# Altium PCB EvvGC v1.2.PcbDoc
Units mm, origin at the board's own origin, x right, y up, seen from the top; angles counter-clockwise.
Board outline 50 x 50 mm, 2 copper layers (Top Layer, Bottom Layer); 65 components, 73 nets, 303 pads, 65 vias.
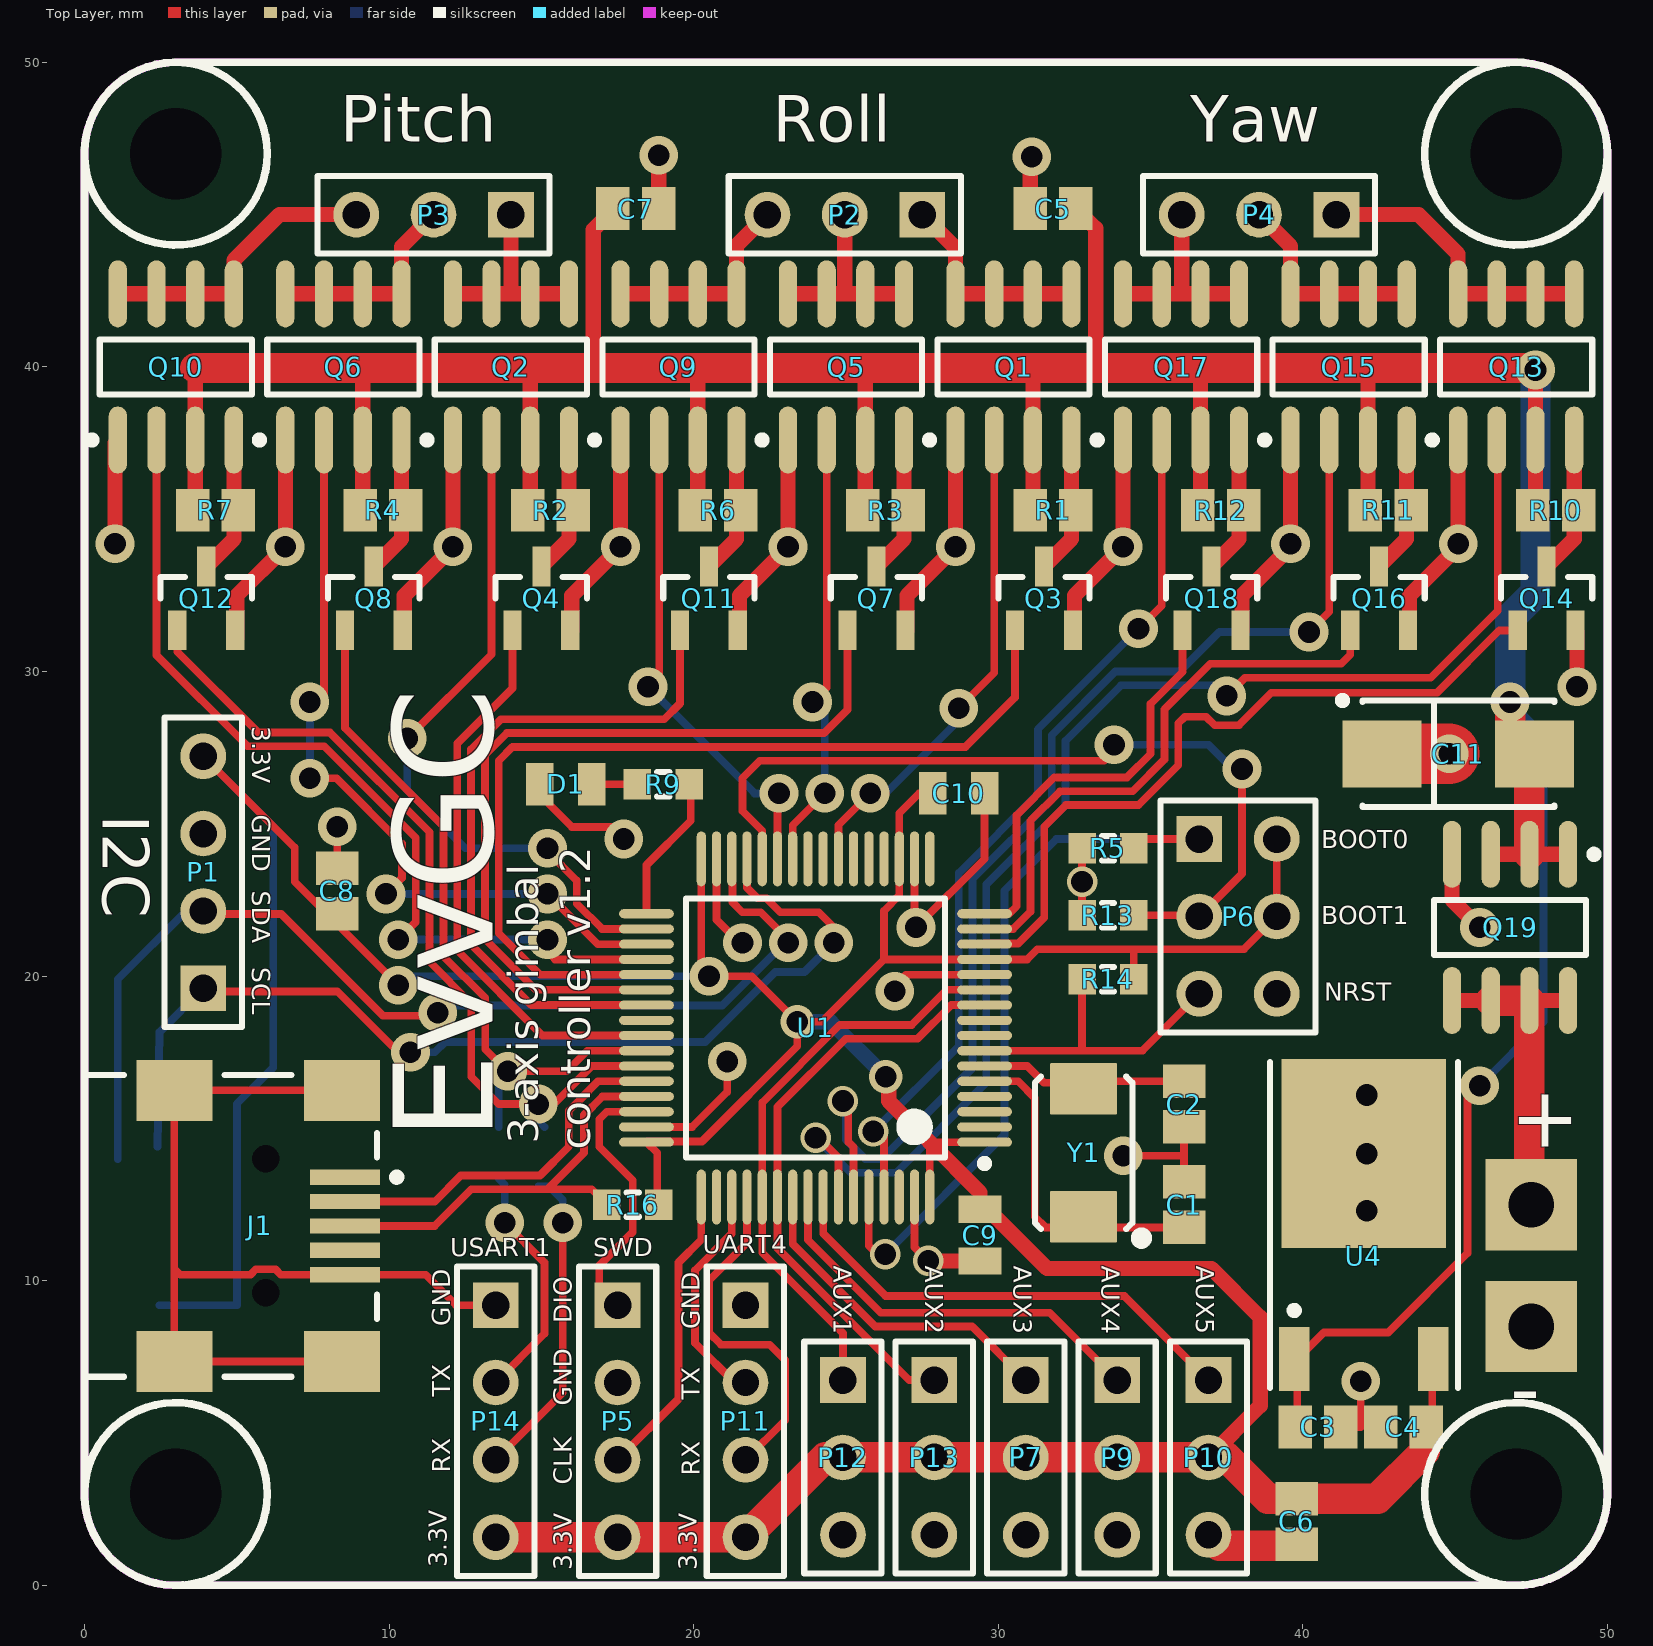
[diagram p0: Top Layer view]
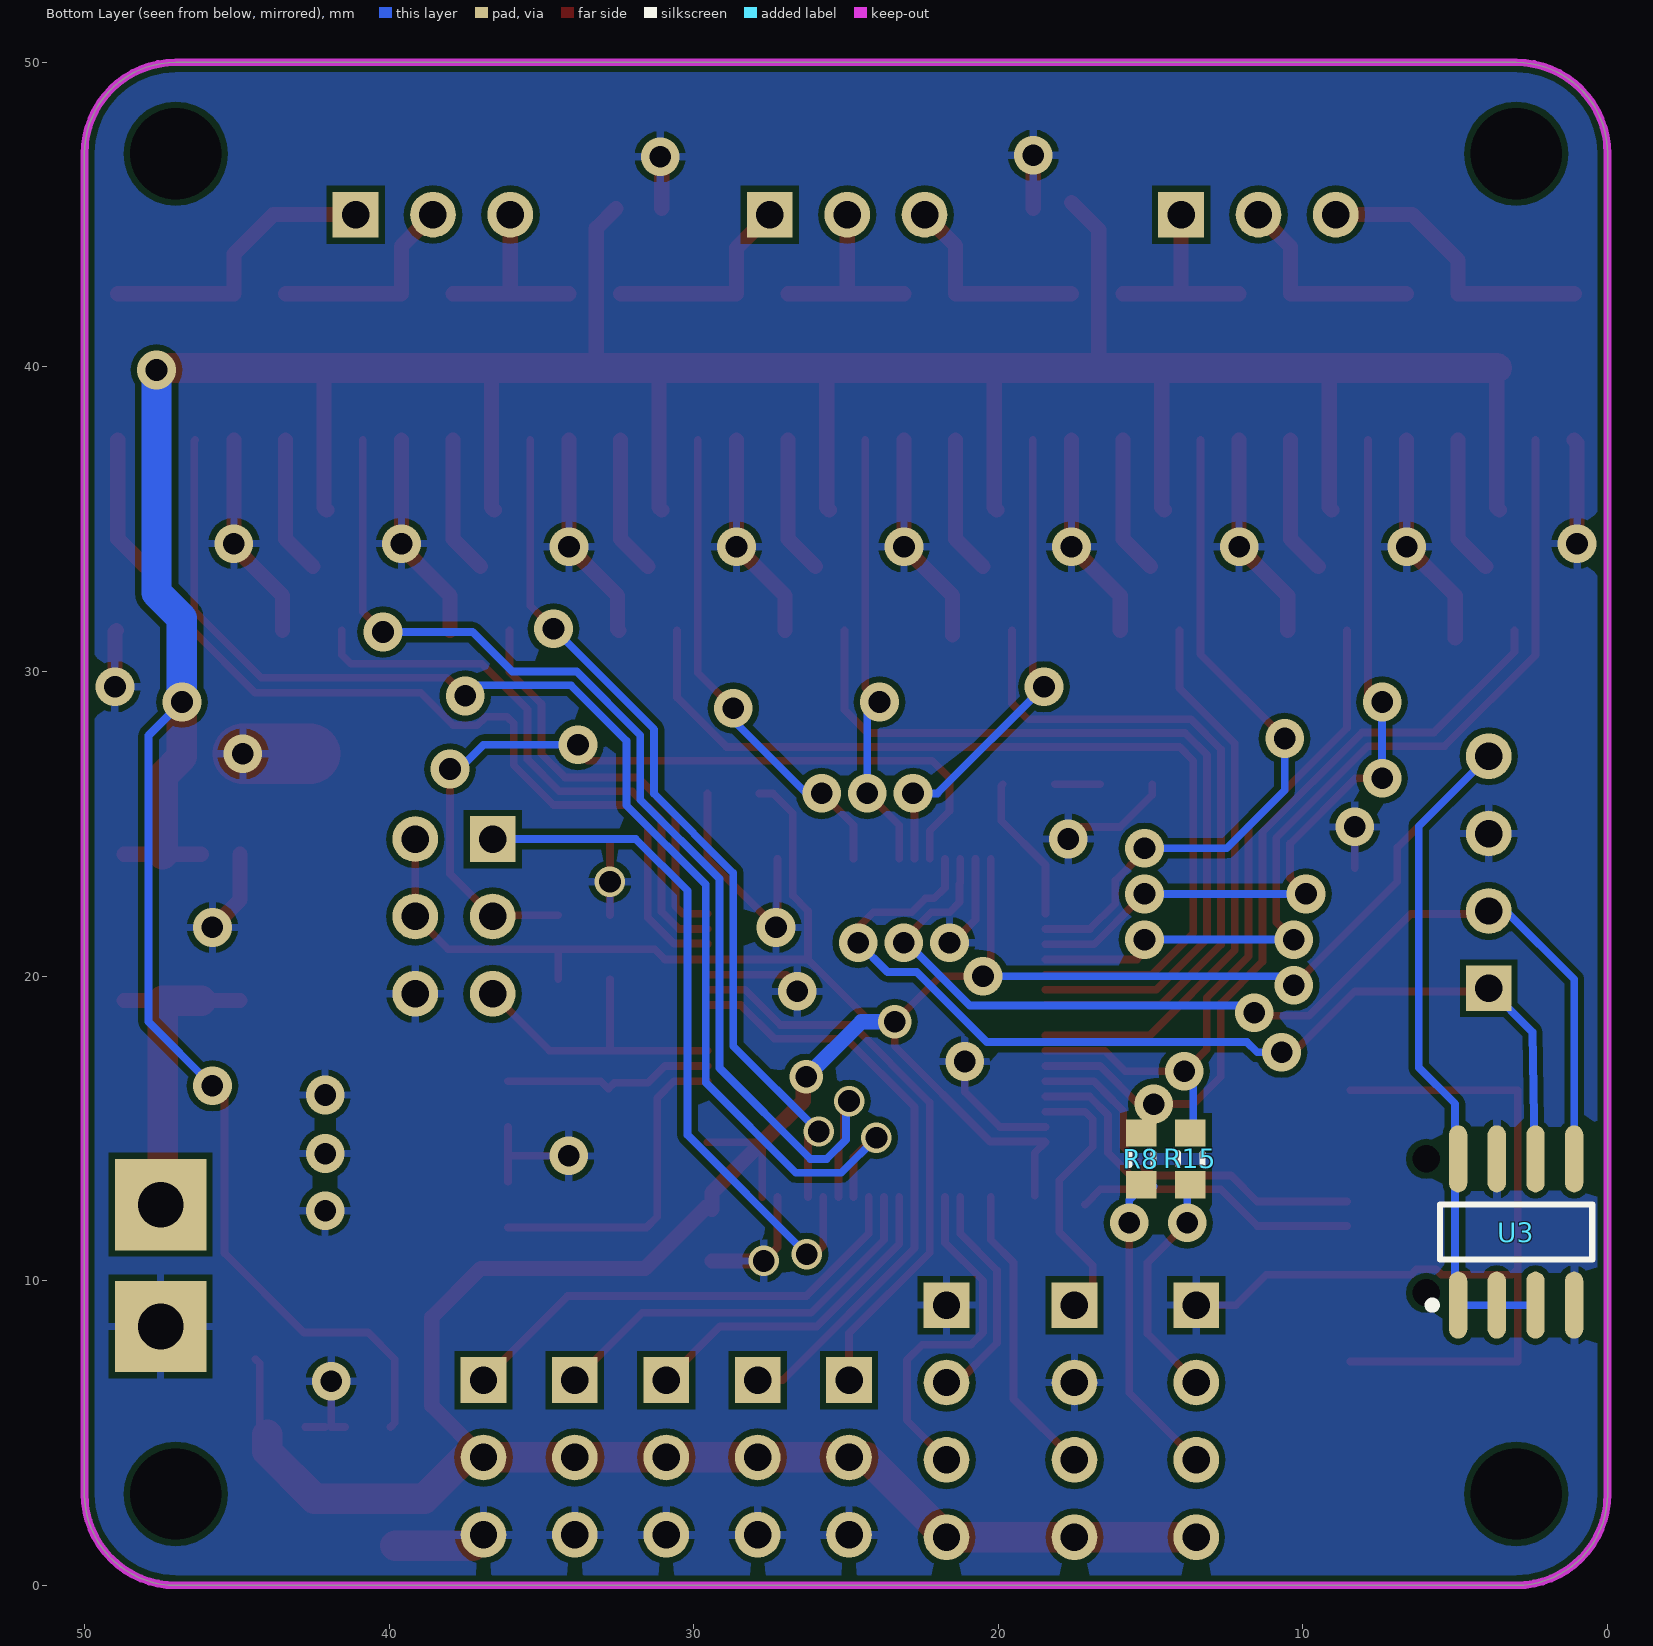
[diagram p1: Bottom Layer view, seen from below]

## Layer stack, top to bottom
Top Layer: signal copper 0.0356
Dielectric: dielectric 0.32, FR-4, Dk 4.8
Bottom Layer: signal copper 0.0356

## Board outline
0,3 ccw(c3,3) 3,0 47,0 ccw(c47,3) 50,3 50,47 ccw(c47,47) 47,50 3,50 ccw(c3,47) 0,47

## Design rules (kind name [scope] priority, off if disabled: settings)
Clearance [All] p1: gap=0.2
PolygonConnect [All] p1: connectstyle=Relief reliefconductorwidth=0.254 reliefentries=4 polygonreliefangle="90 Angle"
RoutingVias [All] p1: holewidth=0.711 width=1.27 viastyle="Through Hole" minholewidth=0.711 minwidth=1.27 maxholewidth=0.711 maxwidth=1.27
SilkscreenOverComponentPads [All] p1: minsilkscreentomaskgap=0.254
SolderMaskExpansion [All] p1: expansion=0.102
Width [All] p1: maxlimit=2 minlimit=0.254 preferedwidth=0.254
27 further rules are at their usual default settings.

## Components (designator, comment, footprint, x,y, rotation, side; value= is the part's Value field where it differs from the comment)
C1 "22pF" CAPC2012L#1 36.1,12.5 r90 top
C2 "22pF" CAPC2012L#1 36.1,15.8 r270 top
C3 "100nF" CAPC2012L#1 40.5,5.2 r0 top
C4 "100nF" CAPC2012L#1 43.3,5.2 r180 top
C5 "100nF" CAPC2012L#1 31.8,45.2 r180 top
C6 "100nF" CAPC2012L#1 39.8,2.1 r270 top
C7 "100nF" CAPC2012L#1 18.1,45.2 r0 top
C8 "100nF" CAPC2012L#1 8.3,22.8 r90 top
C9 "100nF" CAPC2012L#2 29.4,11.5 r270 top
C10 "100nF" CAPC2012L#2 28.7,26 r0 top
C11 "47uF" TC6032-2412 45.1,27.3 r0 top
D1 "LED2" CAPC2012L#2 15.8,26.3 r180 top
J1 "USB Mini" 440247 0.7,11.8 r180 top
P1 "I2C" HDR1X4 3.9,19.6 r90 top
P2 "Header 3" HDR1X3 27.5,45 r180 top
P3 "Header 3" HDR1X3 14,45 r180 top
P4 "Header 3" HDR1X3 41.1,45 r180 top
P5 "SWD" HDR1X4 17.5,9.2 r270 top
P6 "BOOT" HDR2X3 36.6,24.5 r270 top
P7 "Aux3" HDR1X3 30.9,6.74 r270 top
P9 "Aux4" HDR1X3 33.9,6.74 r270 top
P10 "Aux5" HDR1X3 36.9,6.74 r270 top
P11 "UART4" HDR1X4 21.7,9.2 r270 top
P12 "Aux1" HDR1X3 24.9,6.74 r270 top
P13 "Aux2" HDR1X3 27.9,6.74 r270 top
P14 "UART1" HDR1X4 13.5,9.2 r270 top
Q1 "SI4599DY" SO-8_N 30.5,40 r90 top
Q2 "SI4599DY" SO-8_N 14,40 r90 top
Q3 "BSS123" SOT23_N_EM 31.5,32.4 r90 top
Q4 "BSS123" SOT23_N_EM 15,32.4 r90 top
Q5 "SI4599DY" SO-8_N 25,40 r90 top
Q6 "SI4599DY" SO-8_N 8.5,40 r90 top
Q7 "BSS123" SOT23_N_EM 26,32.4 r90 top
Q8 "BSS123" SOT23_N_EM 9.5,32.4 r90 top
Q9 "SI4599DY" SO-8_N 19.5,40 r90 top
Q10 "SI4599DY" SO-8_N 3,40 r90 top
Q11 "BSS123" SOT23_N_EM 20.5,32.4 r90 top
Q12 "BSS123" SOT23_N_EM 4,32.4 r90 top
Q13 "SI4599DY" SO-8_N 47,40 r90 top
Q14 "BSS123" SOT23_N_EM 48,32.4 r90 top
Q15 "SI4599DY" SO-8_N 41.5,40 r90 top
Q16 "BSS123" SOT23_N_EM 42.5,32.4 r90 top
Q17 "SI4599DY" SO-8_N 36,40 r90 top
Q18 "BSS123" SOT23_N_EM 37,32.4 r90 top
Q19 "IRF9335" SO-8_N 46.8,21.6 r270 top
R1 "330R" C0805 31.8,35.3 r180 top
R2 "330R" C0805 15.3,35.3 r180 top
R3 "330R" C0805 26.3,35.3 r180 top
R4 "330R" C0805 9.8,35.3 r180 top
R5 "1K5" RESC1608N 33.6,24.2 r180 top
R6 "330R" C0805 20.8,35.3 r180 top
R7 "330R" C0805 4.3,35.3 r180 top
R8 "1K5" RESC1608N 15.3,14 r270 bottom
R9 "1K5" RESC1608N 19,26.3 r180 top
R10 "330R" C0805 48.3,35.3 r180 top
R11 "330R" C0805 42.8,35.3 r180 top
R12 "330R" C0805 37.3,35.3 r180 top
R13 "1K5" RESC1608N 33.6,22 r0 top
R14 "1K5" RESC1608N 33.6,19.9 r0 top
R15 "1K5" RESC1608N 13.7,14 r270 bottom
R16 "1K5" RESC1608N 18,12.5 r180 top
U1 "STM32F103RCT6" LQFP64_N 24,18.3 r180 top
U3 "24C02C-E/SN" SOIC-SN8_N 3,11.6 r90 bottom
U4 "78M33" TO-252 42,10.8 r0 top
Y1 "8MHz" ABM3 32.8,14.2 r90 top

## Footprints (in the part's own frame and the unit in brackets; to place one, negate y for a bottom-side part, rotate by r counter-clockwise, add the part's x,y. Pads: shape width x height; smd on the part's side, far side on the other; paste and mask are expansions set on the pad)
440247 [mm] "Connector; USB2.0, Type B, SM; 5 Position; Right Angle"
  rect 2.3x0.5 smd: 1(-7.85,-1.6) 2(-7.85,-0.8) 3(-7.85,0) 4(-7.85,0.8) 5(-7.85,1.6)
  rect 2.5x2 smd: 6(-7.75,4.45) 7(-2.25,4.45) 8(-7.75,-4.45) 9(-2.25,-4.45)
  round 0.6 hole 0.9 unplated: MH1(-5.25,2.2) MH2(-5.25,-2.2)
  silkscreen extent -9.68,-4.95 0.7,4.95
ABM3 [mm] "CRYSTAL 5x3.2mm"
  rrect5% 1.7x2.2 smd: 1(-2.1,0) 2(2.1,0)
  silkscreen extent -2.9,-2 2.5,1.6, body extent -3.05,-1.2 3.05,1.2, height 1.3
C0805 [mm] "Chip Capacitor, Body 2.0x1.3mm, IPC High Density"
  rect 1.1x1.4 smd: 1(-0.75,0) 2(0.75,0)
  body extent -1.1,-0.72 1.1,0.72, height 1.4
CAPC2012L#1 [mm] "Chip Capacitor, Body 2.0x1.3mm, IPC High Density"
  rect 1.1x1.4 smd: 1(-0.75,0) 2(0.75,0)
  body extent -1.1,-0.72 1.1,0.72, height 1.1
CAPC2012L#2 [mm] "Chip Capacitor, Body 2.0x1.3mm, IPC High Density"
  rect 0.9x1.4 smd: 1(-0.85,0) 2(0.85,0)
  body extent -1.1,-0.72 1.1,0.72, height 1.4
HDR1X3 [mm] "Connector; Header; 3 Position"
  rect 1.5x1.5 hole 0.9: 1(0,0)
  round 1.5 hole 0.9: 2(2.54,0) 3(5.08,0)
  silkscreen extent -1.27,-1.27 6.35,1.27
HDR1X4 [mm] "Connector; Header; 4 Position"
  rect 1.5x1.5 hole 0.9: 1(0,0)
  round 1.5 hole 0.9: 2(2.54,0) 3(5.08,0) 4(7.62,0)
  silkscreen extent -1.27,-1.27 8.89,1.27
HDR2X3 [mm] "Connector; Header; 3x2 Position"
  rect 1.5x1.5 hole 0.9: 1(0,0)
  round 1.5 hole 0.9: 2(0,2.54) 3(2.54,0) 4(2.54,2.54) 5(5.08,0) 6(5.08,2.54)
  silkscreen extent -1.27,-1.27 6.35,3.81
LQFP64_N [mm] "Thin QFP, 64-Leads, Body 10x10mm, Pitch 0.5mm, IPC Medium Density"
  oval 1.8x0.3 smd: 1(-5.55,3.75) 2(-5.55,3.25) 3(-5.55,2.75) 4(-5.55,2.25) 5(-5.55,1.75) 6(-5.55,1.25) 7(-5.55,0.75) 8(-5.55,0.25) 9(-5.55,-0.25) 10(-5.55,-0.75) 11(-5.55,-1.25) 12(-5.55,-1.75) 13(-5.55,-2.25) 14(-5.55,-2.75) 15(-5.55,-3.25) 16(-5.55,-3.75) 33(5.55,-3.75) 34(5.55,-3.25) 35(5.55,-2.75) 36(5.55,-2.25) 37(5.55,-1.75) 38(5.55,-1.25) 39(5.55,-0.75) 40(5.55,-0.25) 41(5.55,0.25) 42(5.55,0.75) 43(5.55,1.25) 44(5.55,1.75) 45(5.55,2.25) 46(5.55,2.75) 47(5.55,3.25) 48(5.55,3.75)
  oval 0.3x1.8 smd: 17(-3.75,-5.55) 18(-3.25,-5.55) 19(-2.75,-5.55) 20(-2.25,-5.55) 21(-1.75,-5.55) 22(-1.25,-5.55) 23(-0.75,-5.55) 24(-0.25,-5.55) 25(0.25,-5.55) 26(0.75,-5.55) 27(1.25,-5.55) 28(1.75,-5.55) 29(2.25,-5.55) 30(2.75,-5.55) 31(3.25,-5.55) 32(3.75,-5.55) 49(3.75,5.55) 50(3.25,5.55) 51(2.75,5.55) 52(2.25,5.55) 53(1.75,5.55) 54(1.25,5.55) 55(0.75,5.55) 56(0.25,5.55) 57(-0.25,5.55) 58(-0.75,5.55) 59(-1.25,5.55) 60(-1.75,5.55) 61(-2.25,5.55) 62(-2.75,5.55) 63(-3.25,5.55) 64(-3.75,5.55)
  silkscreen extent -5.68,-4.25 4.25,4.57, body extent -5,-5 5,5, height 1.6
RESC1608N [mm] "Chip Resistor, Body 1.6x0.8mm, IPC Medium Density"
  rect 0.9x1 smd: 1(-0.85,0) 2(0.85,0)
  silkscreen extent -0.2,-0.4 0.2,0.4, body extent -0.85,-0.48 0.85,0.48, height 0.6
SO-8_N [mm] "SOIC, 8-Leads, Body 4.9x3.9mm, Pitch 1.27mm, IPC Medium Density"
  oval 2.2x0.6 smd: 1(-2.4,1.905) 2(-2.4,0.635) 3(-2.4,-0.635) 4(-2.4,-1.905) 5(2.4,-1.905) 6(2.4,-0.635) 7(2.4,0.635) 8(2.4,1.905)
  silkscreen extent -2.52,-2.5 0.9,2.88, body extent -1.95,-2.45 1.95,2.45, height 1.75
SOIC-SN8_N [mm] "SOIC, 8-Leads, Body 4.9x3.8mm, Pitch 1.27mm, IPC Medium Density"
  oval 2.2x0.6 smd: 1(-2.4,1.905) 2(-2.4,0.635) 3(-2.4,-0.635) 4(-2.4,-1.905) 5(2.4,-1.905) 6(2.4,-0.635) 7(2.4,0.635) 8(2.4,1.905)
  silkscreen extent -2.52,-2.5 0.9,2.88, body extent -2,-2.5 2,2.5, height 1.75
SOT23_N_EM [mm] "SOT23, 3-Leads, Body 2.9x1.3mm, Pitch 0.95mm, Lead Span 2.3mm, IPC Medium Density"
  rect 1.3x0.6 smd: 1(-1.05,0.95) 2(-1.05,-0.95) 3(1.05,0)
  silkscreen extent 0,-1.5 0.7,1.5, body extent -0.7,-1.5 0.7,1.5, height 1.1
TC6032-2412 [mm] "Capacitor, SM Tantalum; Body 6.0 x 3.2 mm (LxW typ)"
  rect 2.6x2.2 smd: 1(-2.5,0) 2(2.5,0)
  silkscreen extent -3.92,-1.75 3.15,1.87, body extent -3.9,-1.2 3.9,1.2, height 3.4
TO-252 [mm] "D-PAK/TO-252-AA; 3 Leads (1 Cropped); Body 10.1 (inc. leads) x 6.6 mm (LxW max)"
  rect 1x2.1 smd: 1(-2.285,-3.375) 3(2.285,-3.375)
  rect 5.4x6.2 smd: 4(0,3.375)
  silkscreen extent -3.09,-4.32 3.09,6.38

## Part data
C1 C2 C3 C4 C5 C6 C7 C8 C9 C10: library part CAP0805, "Capacitor"
C11: library part Cap, "Capacitor"
D1: "Typical RED, GREEN, YELLOW, AMBER GaAs LED"
J1: library part 440247-2, "USB 2.0, Right Angle, SMT, B Type, Receptacle, 5 Position, Black"
P1 P5 P11 P14: library part "Header 4", "Header, 4-Pin"
P2 P3 P4: "Header, 3-Pin"
P6: library part "Header 3X2", "Header, 3-Pin, Dual row"
P7 P9 P10 P12 P13: library part "Header 3", "Header, 3-Pin"
Q1 Q2 Q5 Q6 Q9 Q10 Q13 Q15 Q17: library part AUIRF7343, "HEXFET Power MOSFET"
Q3 Q4 Q7 Q8 Q11 Q12 Q14 Q16 Q18: library part 2N7002, "N-channel Enhancement Mode Field-effect Transistor"
Q19: library part IRF7404, "HEXFET Power MOSFET"
R1 R2 R3 R4 R6 R7 R10 R11 R12: library part Res, "Resistor"
R5 R8 R9 R13 R14 R15 R16: library part "RES 0603 330R", "RES 0603 1K5"
U1: library part STM32F103RBT6, "STM32 ARM-based 32-bit MCU with 128 Kbytes Flash, 64-pin LQFP, Industrial Temperature"
U3: "2Kbit, 400kHz, 5V, I2C Serial EEPROM, 8-Pin SOIC 150mil, Extended Temperature"
U4: library part L78M05CDT, "Positive Voltage Regulator"
Y1: library part "CRYSTAL 16M SMD5x3.2mm", "CRYSTAL 16M SMD5x3.2mm"

## Free pads (board coordinates)
  round 1.524 hole 3: 0(3,3) 0(3,47) 0(47,3) 0(47,47)
  rect 3x3 hole 1.5: 1(47.5,8.5) 1(47.5,12.5)

## Via types
v1: diameter 1.27, hole 0.711, Top Layer to Bottom Layer, tented both sides, 54 vias
v2: diameter 1, hole 0.711, Top Layer to Bottom Layer, tented both sides, 6 vias
v3: diameter 1.27, hole 0.711, Top Layer to Bottom Layer, 3 vias
v4: diameter 1.1, hole 0.711, Top Layer to Bottom Layer, tented both sides, 2 vias

## Nets (pads, with @x,y where several pads share a name; then routed paths per layer and width w, separated by ;. In a path a pad name is that pad's centre, name@x,y a point inside that pad or via, vN(x,y) a via of type N, cw(c..) or ccw(c..) an arc to the next point about the centre after c; other vN are vias at no path point)
3.3V: C4.1 C6.1 C8.1 C9.1 C10.1 P1.4 P5.4 P6.2 P6.4 P7.2 P9.2 P10.2 P11.4 P12.2 P13.2 P14.4 R14.2 R16.1 U1.1 U1.13 U1.19 U1.32 U1.48 U1.64 U3.1 U3.2 U3.3 U3.8 U4.3 | length 150.8
  Top Layer w0.254: P1.4 6.9,24.22 6.9,23.1 v1(10.3,19.7) ; R16.1@18.8,12.8 18.8,14.2 U1.48 18.473,14.573 20.273,14.573 23.4,17.7 v4(23.4,18.5) ; U1.32 20.25,20.25 v1(20.5,20) 21.9,20 23.3,18.6 v4(23.4,18.5) ; U1.64 27.75,14.55 U1.1 ; C10.1 27.4,26 26.75,25.35 U1.19 26.75,22.65 26.25,22.15 26.25,20.55 ; R14.2 34.45,20.883 ; P6.2 P6.4 38.063,20.883 34.45,20.883 ; C4.1@44.25,5.2 44.25,7.29 U4.3@44.385,7.425 ; v4(23.4,18.5) 24.2,18.5 26.25,20.55 ; 26.25,20.55 U1.13 30.95,20.55 31.283,20.883 34.45,20.883
  Top Layer w0.5: v4@23.3,18.6 v4@23.5,18.6 ; v4(23.4,18.5) v4@23.5,18.6 ; v4(26.3,16.7) 26.4,16.6 26.4,15.9 27.75,14.55 29.4,12.9 C9.1 ; C9.1@29.55,12.45 31.6,10.4 37,10.4 38.6,8.8 38.6,5.9 P10.2
  Top Layer w1: P14.4 P11.4 24.32,4.2 P12.2 P13.2 P7.2 P9.2 P10.2 37.5,4.2 38.85,2.85 C6.1 42.45,2.85 44,4.4 C4.1@44,4.95
  Bottom Layer w0.254: U3.3@2.465,9.2 U3.2 U3.1 5.005,9.2 5.005,15.805 6.2,17 6.2,24.92 P1.4 ; v1(10.3,19.7) 10.3,19.8 10.5,20 v1(20.5,20)
  Bottom Layer w0.5: v4(23.4,18.5) 24.5,18.5 v4(26.3,16.7)
5V: J1.1
12V: pad.1@47.5,12.5 Q19.5 Q19.6 Q19.7 Q19.8 | length 10.5
  Top Layer w0.5: Q19.5 Q19.6 ; Q19.7 Q19.8
  Top Layer w1: Q19.6 Q19.7 47.435,12.565 pad.1@47.5,12.5
"12V MOTOR": C3.1 C5.1 C7.1 C11.2 Q1.3 Q2.3 Q5.3 Q6.3 Q9.3 Q10.3 Q13.3 Q15.3 Q17.3 Q19.1 Q19.2 Q19.3 R1.2 R2.2 R3.2 R4.2 R6.2 R7.2 R10.2 R11.2 R12.2 U4.1 | length 145.7
  Top Layer w0.254: C3.1@39.95,5.2 39.815,5.335 39.815,7.425 40.69,8.3 42.8,8.3 45.4,10.9 45.4,16 v1(45.8,16.4)
  Top Layer w0.5: R7.2 3.635,35.385 Q10.3 3.635,39.965 ; R4.2 9.135,35.385 Q6.3 9.135,39.9 9.2,39.965 ; R2.2 14.635,35.385 Q2.3 14.635,39.93 14.6,39.965 ; 16.7,39.965 16.7,44.5 C7.1@17.6,45.4 ; R6.2 20.135,35.385 Q9.3 20.135,39.9 20.2,39.965 ; R3.2 25.635,35.385 Q5.3 25.635,39.8 25.8,39.965 ; R1.2 31.135,35.385 Q1.3 31.135,39.8 31.3,39.965 ; C5.1 33.2,44.55 33.2,39.965 ; 36.5,39.965 36.635,39.83 Q17.3 36.635,35.385 R12.2 ; R11.2 42.135,35.385 Q15.3 42.135,39.9 42.2,39.965 ; Q19.3 Q19.2 Q19.1 ; R10.2 47.635,35.385 Q13.3 v1(47.635,39.9) v1@47.7,39.965
  Top Layer w1: 3.635,39.965 9.2,39.965 14.6,39.965 16.7,39.965 ; 16.8,39.965 20.2,39.965 25.8,39.965 31.3,39.965 33.2,39.965 ; 33.3,39.965 36.5,39.965 42.2,39.965 v1@47.7,39.965 ; v1(46.8,29) 46.8,27.2 47.435,26.565 Q19.2
  Bottom Layer w0.254: v1(45.8,16.4) 47.9,18.5 47.9,27.9 v1(46.8,29)
  Bottom Layer w1: v1(46.8,29) 46.8,31.75 47.635,32.585 v1(47.635,39.9)
AUX1: P12.1 U1.11 U1.53 | length 19
  Top Layer w0.254: P12.1 24.9,8.274 22.25,10.924 U1.53 22.25,15.85 24.8,18.4 27.16,18.4 28.31,19.55 U1.11
AUX2: P13.1 U1.10 U1.54 | length 19.8
  Top Layer w0.254: P13.1 27.076,6.74 22.75,11.066 U1.54 22.75,15.708 24.988,17.946 27.349,17.946 28.453,19.05 U1.10
AUX3: P7.1 U1.55 | length 11
  Top Layer w0.254: U1.55 23.25,11.208 25.958,8.5 29.14,8.5 P7.1
AUX4: P9.1 U1.56 | length 13.5
  Top Layer w0.254: U1.56 23.75,11.35 26.146,8.954 31.686,8.954 P9.1
AUX5: P10.1 U1.57 | length 15.8
  Top Layer w0.254: U1.57 24.25,11.55 26.3,9.5 34.14,9.5 P10.1
BOOT0: P6.1 R5.1 U1.60 | length 25.1
  Top Layer w0.254: U1.60 25.75,11.15 26.028,10.872 v2(26.288,10.872) ; R5.1@34.45,24.5 P6.1
  Bottom Layer w0.254: v2(26.288,10.872) 30.2,14.784 30.2,22.8 31.9,24.5 P6.1
BOOT1: P6.3 R13.2 U1.28 | length 28.5
  Top Layer w0.254: U1.28 22.25,24.775 21.6,25.425 21.6,26.5 22.171,27.071 33.471,27.071 34,27.6 v1(33.8,27.6) ; R13.2 36.56,22 P6.3 38,23.36 v1(38,26.8)
  Bottom Layer w0.254: v1(33.8,27.6) 36.9,27.6 38,26.5 v1(38,26.8)
DM: J1.2 U1.44 | length 12.2
  Top Layer w0.254: J1.2 11.5,12.6 12.354,13.454 14.954,13.454 15.9,14.4 15.9,15.584 16.546,16.23 16.546,16.238 16.858,16.55 U1.44
DP: J1.3 R16.2 U1.45 | length 14.5
  Top Layer w0.254: J1.3 11.5,11.8 12.7,13 16.65,13 R16.2 ; 15.2,13 16.4,14.2 16.4,15.442 17,16.042 17,16.05 U1.45
GND: C1.2 C2.2 C3.2 C4.2 C5.2 C6.2 C7.2 C8.2 C9.2 C10.2 C11.1 D1.2 J1.5 J1.6 J1.7 J1.8 J1.9 P1.3 P5.2 P6.6 P7.3 P9.3 P10.3 P11.1 P12.3 P13.3 P14.1 pad.1@47.5,8.5 Q1.1 Q2.1 Q3.2 Q4.2 Q5.1 Q6.1 Q7.2 Q8.2 Q9.1 Q10.1 Q11.2 Q12.2 Q13.1 Q14.2 Q15.1 Q16.2 Q17.1 Q18.2 Q19.4 R5.2 R13.1 U1.12 U1.18 U1.31 U1.47 U1.63 U3.4 U3.7 U4.4 | length 141.5
  Top Layer w0.254: C8.2 v1(8.3,24.9) ; J1.6 J1.7 2.95,10.4 ; J1.8 J1.9 2.95,10.4 ; J1.5 11.2,10.2 12.2,9.2 P14.1 ; J1.5 6.449,10.2 6.272,10.377 5.628,10.377 5.451,10.2 3.15,10.2 2.95,10.4 ; D1.2 14.95,25.95 16,24.9 17.3,24.9 v1(17.7,24.5) ; U1.47 19.95,15.05 21.1,16.2 v1(21.1,17.2) ; U1.31 20.75,21.85 v1@21.9,20.7 ; v1(26.6,19.5) v1@26.6,19.689 ; v1@26.6,19.689 26.961,20.05 U1.12 ; U1.63 27.25,11.1 v2(27.7,10.65) ; U1.18 27.25,21.65 v1(27.3,21.6) 29.55,23.85 C10.2 ; R13.1 v2(32.75,23.1) R5.2 R5.2@32.75,24.5 ; v1(34.1,14.1) 36.1,14.1 ; C1.2 36.1,14.1 ; C2.2 36.1,14.1 ; C3.2@41.45,5.2 41.9,5.2 v1(41.9,6.7) ; C4.2@42.1,5.2 C4.2@42.75,5.2
  Top Layer w0.5: v1(1,34.2) 1,37.505 Q10.1 ; Q12.2@5,31.1 5,32.5 v1(6.595,34.095) Q6.1 ; Q8.2@10.5,31.35 10.5,32.5 v1(12.095,34.095) Q2.1 ; Q4.2@16,31.35 16,32.5 v1(17.595,34.095) Q9.1 ; C7.2 v1(18.85,46.95) ; Q11.2@21.5,31.2 21.5,32.5 v1(23.095,34.095) Q5.1 ; Q7.2@27,31.35 27,32.5 v1(28.595,34.095) Q1.1 ; v2(27.7,10.65) C9.2 ; C5.2 31.05,46.85 v1(31.1,46.9) ; Q3.2 32.5,31.4 32.5,32.5 v1(34.095,34.095) Q17.1 ; Q18.2@38,31.35 38,32.5 39.595,34.095 v1(39.595,34.2) Q15.1 ; Q16.2@43.5,31.35 43.5,32.5 45.095,34.095 v1(45.095,34.2) Q13.1 ; Q19.4 44.895,22.505 v1(45.8,21.6) ; pad.1@46.6,8.5 47.5,8.5 pad.1@47.25,8.75 ; Q14.2 49,31.3 v1(49,29.5)
  Top Layer w1: P10.3 37.26,1.3 C6.2@39.8,1.3
  Top Layer w2: C11.1 v1(44.8,27.3)
  Bottom Layer w0.5: v1(18.85,46.95) v1@18.9,46.9
  other v1: 21.6,21.1
  other v3: 42.1,12.3 42.1,14.175 42.1,16.1
LED: R9.1 U1.33 | length 4.9
  Top Layer w0.254: U1.33 18.45,23.65 19.9,25.1 19.9,26.25 R9.1
NetC1_1: C1.1 U1.5 Y1.1 | length 10.8
  Top Layer w0.254: U1.5 30.65,16.55 31.2,16 31.2,12.1 31.55,11.75 C1.1
NetC2_1: C2.1 U1.6 Y1.2 | length 7
  Top Layer w0.254: U1.6 30.95,17.05 31.5,16.5 32.6,16.5 Y1.2 33.05,16.55 C2.1
NetD1_1: D1.1 R9.2 | length 1.5
  Top Layer w0.254: D1.1 R9.2
NetP14_2: P14.2 R15.2 | length 8
  Top Layer w0.254: P14.2 15.1,8.26 15.1,10.6 v1(13.8,11.9)
  Bottom Layer w0.254: R15.2@13.6,13.35 13.8,13.15 v1(13.8,11.9)
NetP14_3: P14.3 R8.2 | length 10.6
  Top Layer w0.254: P14.3 15.7,6.32 15.7,12 v1(15.7,11.9)
  Bottom Layer w0.254: R8.2@14.9,13.1 15.251,13.1 15.7,12.651 v1(15.7,11.9)
NetQ1_4: Q1.4 Q3.3 R1.1 | length 4.5
  Top Layer w0.5: Q3.3 32.405,34.355 Q1.4
NetQ2_4: Q2.4 Q4.3 R2.1 | length 4.5
  Top Layer w0.5: Q4.3 15.905,34.355 Q2.4
NetQ5_4: Q5.4 Q7.3 R3.1 | length 4.5
  Top Layer w0.5: Q7.3 26.905,34.355 Q5.4
NetQ6_4: Q6.4 Q8.3 R4.1 | length 4.5
  Top Layer w0.5: Q8.3 10.405,34.355 Q6.4
NetQ9_4: Q9.4 Q11.3 R6.1 | length 4.5
  Top Layer w0.5: Q11.3 21.405,34.355 Q9.4
NetQ10_4: Q10.4 Q12.3 R7.1 | length 4.5
  Top Layer w0.5: Q12.3 4.905,34.355 Q10.4
NetQ13_4: Q13.4 Q14.3 R10.1 | length 4.5
  Top Layer w0.5: Q14.3 48.905,34.355 Q13.4
NetQ15_4: Q15.4 Q16.3 R11.1 | length 4.5
  Top Layer w0.5: Q16.3 43.405,34.355 Q15.4
NetQ17_4: Q17.4 Q18.3 R12.1 | length 4.5
  Top Layer w0.5: Q18.3 37.905,34.355 Q17.4
NRST: P6.5 R14.1 U1.7 | length 10.2
  Top Layer w0.254: U1.7 32.8,17.55 ; R14.1 32.75,17.6 32.8,17.55 ; P6.5 34.73,17.55 32.8,17.55
PA3: U1.17
PA4: U1.20
PA5: U1.21
PA6: U1.22
PA15: U1.50
PB9: U1.62
PC0: U1.8
PC1: U1.9
PC4: U1.24
PC5: U1.25
PITCHA: Q3.1 U1.37 | length 31.1
  Top Layer w0.254: U1.37 14.96,20.05 13.6,21.41 13.6,27.074 14.051,27.525 28.925,27.525 30.55,29.15 Q3.1
PITCHAN: Q1.2 U1.23 | length 16.9
  Top Layer w0.254: U1.23 24.75,24.95 v1@26,26.2 ; v1(25.8,26) v1@26.3,26 ; v1(28.7,28.8) 29.865,29.965 Q1.2
  Bottom Layer w0.254: v1(25.8,26) 26.3,26 28.7,28.4 v1(28.7,28.8)
PITCHAOUT: P2.1 Q1.5 Q1.6 Q1.7 Q1.8 | length 6.9
  Top Layer w0.5: P2.1 28.595,43.905 Q1.8 Q1.7 Q1.6 Q1.5
PITCHB: Q7.1 U1.38 | length 27.2
  Top Layer w0.254: U1.38 14.818,19.55 13.146,21.222 13.146,27.262 13.863,27.979 24.279,27.979 25.05,28.75 Q7.1
PITCHBN: Q5.2 U1.26 | length 14.5
  Top Layer w0.254: U1.26 23.25,24.95 v1(24.3,26) ; v1(23.9,29) 24.365,29.465 Q5.2
  Bottom Layer w0.254: v1(23.9,29) 24.3,28.6 v1(24.3,26)
PITCHBOUT: P2.2 Q5.5 Q5.6 Q5.7 Q5.8 | length 6.4
  Top Layer w0.5: Q5.8 Q5.7 25,42.4 ; P2.2 24.96,42.44 25,42.4 ; Q5.5 Q5.6 25,42.4
PITCHC: Q11.1 U1.39 | length 22.9
  Top Layer w0.254: U1.39 14.676,19.05 12.692,21.034 12.692,27.45 13.675,28.433 19.033,28.433 19.55,28.95 Q11.1
PITCHCN: Q9.2 U1.27 | length 16.3
  Top Layer w0.254: v1(18.5,29.5) 18.8,29.5 18.865,29.565 Q9.2 ; U1.27 22.75,25.95 v1(22.8,26)
  Bottom Layer w0.254: v1(18.5,29.5) 22,26 v1(22.8,26)
PITCHCOUT: P2.3 Q9.5 Q9.6 Q9.7 Q9.8 | length 6.8
  Top Layer w0.5: Q9.8 Q9.7 Q9.6 Q9.5 21.405,43.985 P2.3
ROLLA: Q4.1 U1.41 | length 18.6
  Top Layer w0.254: Q4.1 14.05,29.45 12.238,27.638 12.238,20.846 15.034,18.05 U1.41
ROLLAN: Q2.2 U1.34 | length 23.2
  Top Layer w0.254: v1(10.6,27.8) 13.365,30.565 Q2.2 ; v1(15.2,24.2) 15.2,24.1 16.162,23.138 16.162,22.38 16.992,21.55 U1.34
  Bottom Layer w0.254: v1(10.6,27.8) 10.6,26.1 12.5,24.2 v1(15.2,24.2) v1@15.2,24.5
ROLLAOUT: P3.1 Q2.5 Q2.6 Q2.7 Q2.8 | length 6.4
  Top Layer w0.5: Q2.8 Q2.7 14,42.4 ; P3.1 14,42.4 ; Q2.5 Q2.6 14,42.4
ROLLB: Q8.1 R15.1 U1.42 | length 23.6
  Top Layer w0.254: Q8.1 8.55,28.15 11.784,24.916 11.784,20.658 13.154,19.288 13.154,17.6 13.778,16.976 13.778,16.876 v1(13.897,16.876) 15.834,16.876 16.508,17.55 U1.42
  Bottom Layer w0.254: R15.1@13.6,15.05 13.6,16.579 v1(13.897,16.876) 13.873,16.9 v1@13.8,16.9
ROLLBN: Q6.2 U1.35 | length 26.6
  Top Layer w0.254: v1(7.4,26.5) 8.274,26.5 10.422,24.352 10.422,23.222 v1(9.9,22.7) ; v1(7.4,29) 7.7,29 7.865,29.165 Q6.2 ; v1(15.2,22.7) 15.2,22.5 15.4,22.5 16.85,21.05 U1.35
  Bottom Layer w0.254: v1(7.4,26.5) v1(7.4,29) ; v1(9.9,22.7) v1(15.2,22.7)
ROLLBOUT: P3.2 Q6.5 Q6.6 Q6.7 Q6.8 | length 6.8
  Top Layer w0.5: Q6.8 Q6.7 Q6.6 Q6.5 10.405,43.945 P3.2
ROLLC: Q12.1 R8.1 U1.43 | length 27.5
  Top Layer w0.254: Q12.1 3.05,30.65 5.7,28 8.058,28 11.33,24.728 11.33,20.47 12.7,19.1 12.7,16.7 13.6,15.8 v1(14.9,15.8) 15.4,15.8 16.65,17.05 U1.43
  Bottom Layer w0.254: v1(14.9,15.8) 14.9,15.25 R8.1@15.1,15.05
ROLLCN: Q10.2 U1.36 | length 30.3
  Top Layer w0.254: Q10.2 2.365,30.535 5.354,27.546 7.87,27.546 10.876,24.54 10.876,21.776 v1(10.3,21.2) ; v1(15.2,21.2) 15.2,20.8 15.45,20.55 U1.36
  Bottom Layer w0.254: v1(10.3,21.2) v1(15.2,21.2)
ROLLCOUT: P3.3 Q10.5 Q10.6 Q10.7 Q10.8 | length 9.5
  Top Layer w0.5: Q10.8 Q10.7 Q10.6 Q10.5 4.905,43.505 6.4,45 P3.3
RX: P11.3 U1.52 | length 11.7
  Top Layer w0.254: P11.3 23,5.42 23,7.4 22.5,7.9 20.9,7.9 20.5,8.3 20.5,10 21.75,11.25 U1.52
SCL: P1.1 U1.29 U3.6 | length 33.7
  Top Layer w0.254: P1.1@3.9,19.5 8.3,19.5 10.1,17.7 10.5,17.7 v1(10.7,17.5) ; U1.29 21.75,22.904 22.1,22.554 22.388,22.554 22.842,22.1 24.1,22.1 24.6,21.6 v1(24.6,21.1)
  Bottom Layer w0.254: U3.6@2.4,14.4 2.465,18.165 P1.1 ; v1(10.7,17.5) 11.5,17.5 11.838,17.838 20.377,17.838 22.677,20.138 23.638,20.138 v1(24.6,21.1)
SDA: P1.2 U1.30 U3.5 | length 35.1
  Top Layer w0.254: P1.2@3.9,22.04 6.46,22.04 9.8,18.7 11.5,18.7 v1(11.6,18.8) ; U1.30 21.25,23.05 21.273,23.027 21.273,22.427 21.6,22.1 22.2,22.1 23.1,21.2 v1(23.1,21.1)
  Bottom Layer w0.254: U3.5 1.095,19.895 3.34,22.14 P1.2 ; v1(11.6,18.8) 11.838,19.038 20.935,19.038 22.997,21.1 v1(23.1,21.1)
SWCLK: P5.3 U1.49 | length 9.8
  Top Layer w0.254: P5.3 19.5,6.12 19.5,10.6 20.25,11.35 U1.49
SWDIO: P5.1 U1.46 | length 8.9
  Top Layer w0.254: P5.1 16.9,9.8 16.9,10.5 18,11.6 18,13.3 17.473,13.827 16.9,14.4 16.9,15.3 17.15,15.55 U1.46
TX: P11.2 U1.51 | length 7.5
  Top Layer w0.254: U1.51 21.25,11.55 20.046,10.346 20.046,7.954 21.34,6.66 P11.2
YAWA: Q14.1 U1.14 | length 24.6
  Top Layer w0.254: U1.14 U1.14@29.573,21.073 ; U1.14@29.55,21.073 U1.14@29.573,21.073 ; Q14.1 46.45,31.35 44.4,29.3 38.96,29.3 37.898,28.238 37.102,28.238 36.82,28.52 36.128,28.52 35.908,28.3 35.908,26.924 34.6,25.616 32.216,25.616 31.508,24.908 31.508,21.924 30.657,21.073 U1.14@29.573,21.073
YAWAN: Q13.2 U1.58 | length 43.8
  Top Layer w0.254: v2(24,14.7) 24.1,14.7 24.75,14.05 U1.58 ; v1(37.5,29.2) 38.1,29.8 44.2,29.8 46.4,32 46.4,37.565 Q13.2
  Bottom Layer w0.254: v2(24,14.7) 25.154,13.546 26.646,13.546 29.608,16.508 29.608,23.008 32.208,25.608 32.208,27.724 34.03,29.546 37.154,29.546 v1(37.5,29.2)
YAWAOUT: P4.1 Q13.5 Q13.6 Q13.7 Q13.8 | length 9.6
  Top Layer w0.5: P4.1 43.8,45 45.095,43.705 Q13.8 Q13.7 Q13.6 Q13.5
YAWB: Q16.1 U1.15 | length 19.2
  Top Layer w0.254: U1.15 30.492,21.55 31.054,22.112 31.054,25.096 32.028,26.07 34.412,26.07 35.454,27.112 35.454,28.754 36.954,30.254 41.254,30.254 41.55,30.55 Q16.1
YAWBN: Q15.2 U1.59 | length 38.9
  Top Layer w0.254: v2(24.9,15.9) 25.073,15.727 25.073,14.557 25.25,14.38 U1.59 ; v1(40.2,31.3) 40.865,31.965 Q15.2
  Bottom Layer w0.254: v2(24.9,15.9) 25,16 25,14.63 25.63,14 26.17,14 29.154,16.984 29.154,23.196 31.754,25.796 31.754,27.912 33.842,30 35.958,30 37.258,31.3 v1(40.2,31.3)
YAWBOUT: P4.2 Q15.5 Q15.6 Q15.7 Q15.8 | length 6.8
  Top Layer w0.5: P4.2 39.595,43.965 Q15.8 Q15.7 Q15.6 Q15.5
YAWC: Q18.1 U1.16 | length 13.9
  Top Layer w0.254: U1.16 30.35,22.05 30.6,22.3 30.6,25.284 31.84,26.524 34.224,26.524 35,27.3 35,28.942 36.05,29.992 Q18.1
YAWCN: Q17.2 U1.61 | length 29
  Top Layer w0.254: v2(25.9,14.9) 26.1,14.9 26.25,14.75 U1.61 ; v1(34.6,31.4) 35.365,32.165 Q17.2
  Bottom Layer w0.254: v2(25.9,14.9) 28.7,17.7 28.7,23.384 31.3,25.984 31.3,28.1 v1(34.6,31.4)
YAWCOUT: P4.3 Q17.5 Q17.6 Q17.7 Q17.8 | length 6.5
  Top Layer w0.5: Q17.8 Q17.7 35.9,42.4 ; P4.3 36.02,42.52 35.9,42.4 ; Q17.5 Q17.6 35.9,42.4
pads on no net: J1.4 J1.MH1 J1.MH2 U1.2 U1.3 U1.4 U1.40

## Polygon pours and split planes (outlines as drawn)
GND on Bottom Layer "Keep-Out Layer-No Net" (solid, remove dead copper, pour order 2): -0.333,0 50,0 50,49.667 -0.333,49.667

## Keep-outs
Keep-Out Layer:
  the board outline again, w0.254

## Silkscreen, mask and mechanical layers (free items; w line width, h text height)
Top Overlay:
  circle w0.254: c3,3 r3
  circle w0.254: c47,3 r3
  circle w0.254: c47,47 r3
  circle w0.254: c3,47 r3
  lines w0.254: 0,3 0,47 ; 3,0 47,0 ; 3,50 47,50 ; 50,3 50,47
  text "Pitch" at 8.4,47.4 h1.52
  text "Roll" at 22.6,47.4 h1.52
  text "Yaw" at 36.3,47.4 h1.52
  text "3.3V" at 5.5,28.2 h0.6 r270
  text "GND" at 5.5,25.3 h0.6 r270
  text "BOOT0" at 40.6,24.2 h0.6
  text "SDA" at 5.5,22.8 h0.6 r270
  text "BOOT1" at 40.6,21.7 h0.6
  text "SCL" at 5.5,20.3 h0.6 r270
  text "NRST" at 40.7,19.2 h0.6
  text "EvvGC" at 13.4,14.6 h3.3 r90
  text "3-axis gimbal" at 14.9,14.5 h1 r90
  text "+" at 46.8,14.4 h2
  text "controller v1.2" at 16.6,14.3 h1 r90
  text "UART4" at 20.3,10.9 h0.6
  text "USART1" at 12,10.8 h0.6
  text "SWD" at 16.7,10.8 h0.6
  text "AUX1" at 24.6,10.5 h0.6 r270
  text "AUX2" at 27.6,10.5 h0.6 r270
  text "AUX3" at 30.5,10.5 h0.6 r270
  text "AUX4" at 33.4,10.5 h0.6 r270
  text "AUX5" at 36.5,10.5 h0.6 r270
  text "DIO" at 16,8.6 h0.6 r90
  text "GND" at 12,8.5 h0.6 r90
  text "GND" at 20.2,8.4 h0.6 r90
  text "TX" at 12,6.2 h0.6 r90
  text "TX" at 20.2,6.1 h0.6 r90
  text "GND" at 16,5.9 h0.6 r90
  text "-" at 46.8,5.5 h2
  text "RX" at 12,3.7 h0.6 r90
  text "RX" at 20.2,3.6 h0.6 r90
  text "CLK" at 16,3.3 h0.6 r90
  text "3.3V" at 11.9,0.6 h0.6 r90
  text "3.3V" at 16,0.5 h0.6 r90
  text "3.3V" at 20.1,0.5 h0.6 r90

## Text inside footprints (layer, text, board x,y; h text height)
J1: Mechanical 1 "PCB Edge" at 0.268,15.836 h0.25 r270